# EAGLE board HV Board rev6 (EAGLE 9.2.2)
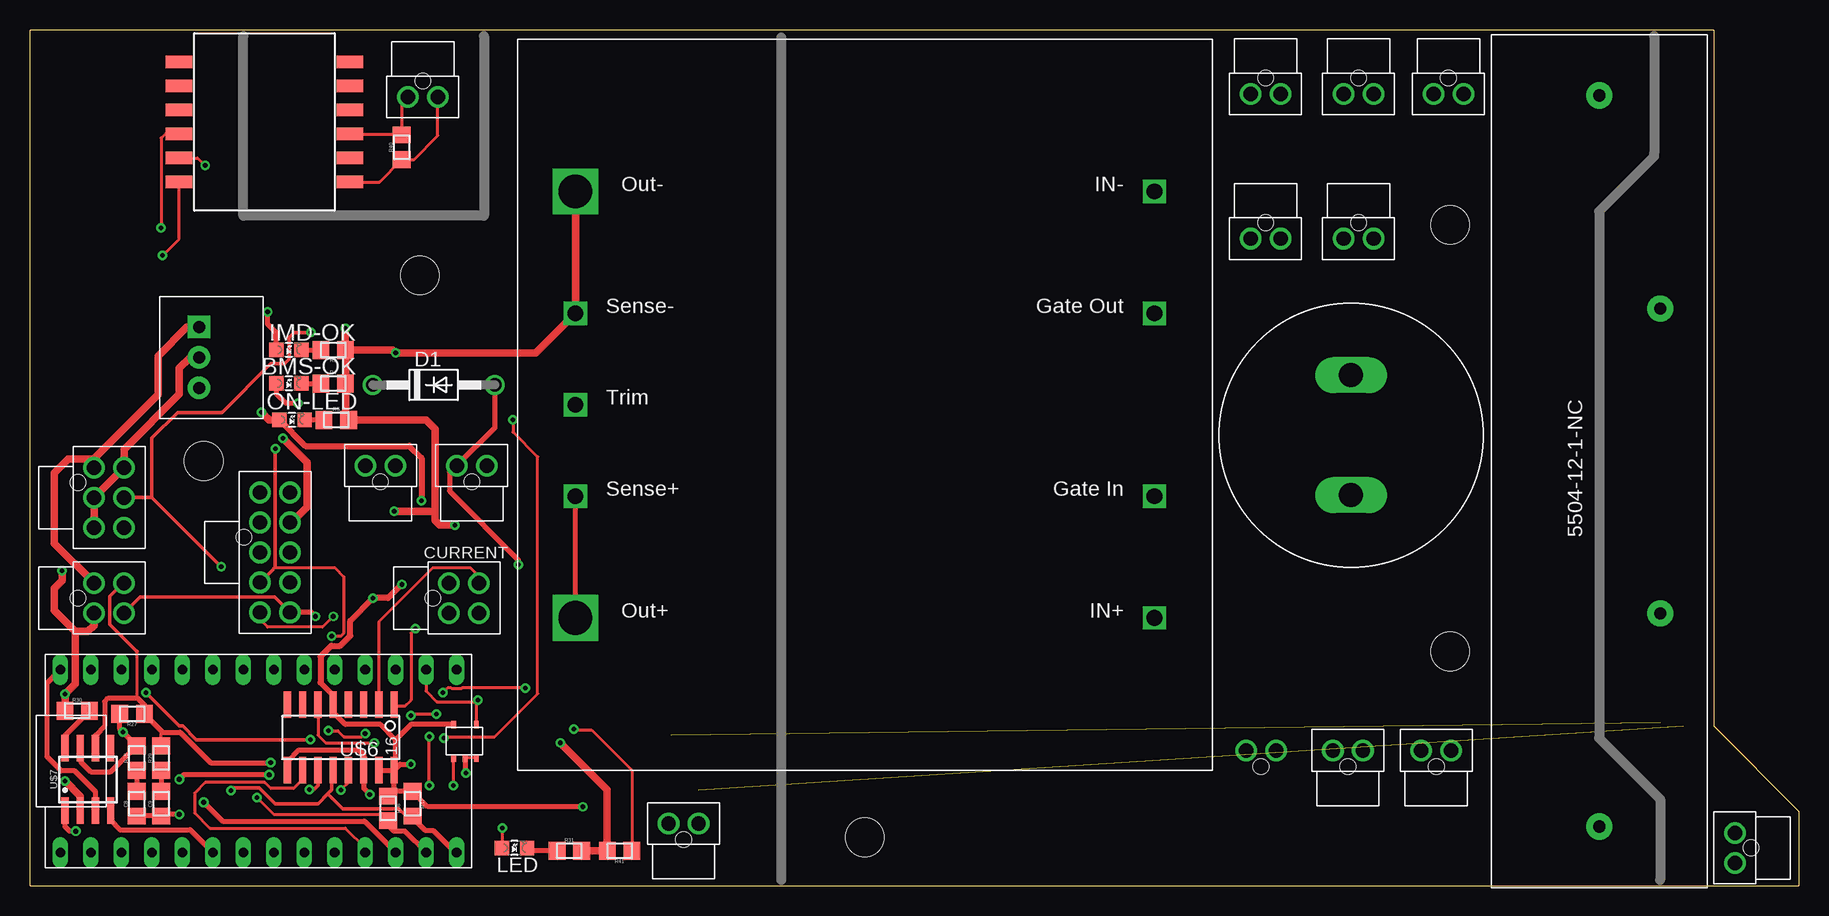
[diagram p0: board, top side]
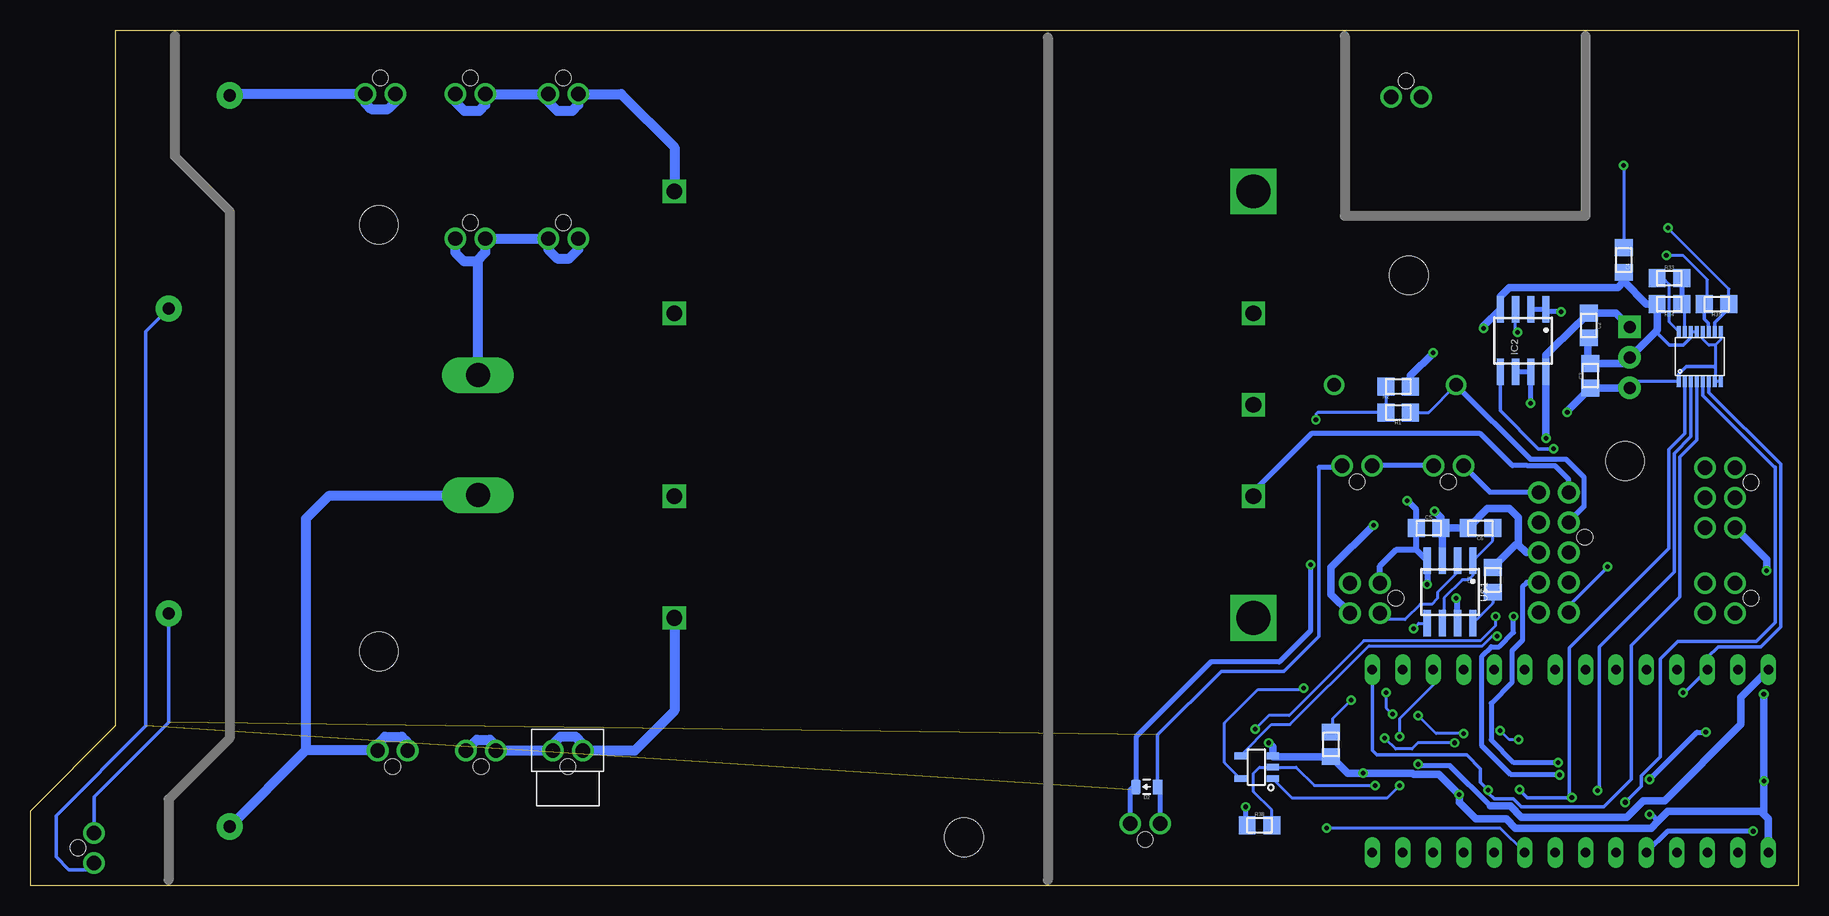
[diagram p1: board, bottom side, seen from below]

Size 147.45 x 71.37 mm. Coordinates in mm from the lower left corner, seen from the top.
Outline: 0,0 147.45,0 147.45,6.22 140.34,13.34 140.34,71.37 0,71.37 0,0
Copper layers (1*16): Top 0.035mm / dielectric 1.5mm / Bottom 0.035mm
Design rules "DRC Advanced Circuits": minimum track width 6mil, minimum drill 10mil, track to track 6mil, track to pad 6mil, pad to pad 6mil, via to via 6mil, smd to smd 6mil, copper to edge 40mil, drill to drill 6mil, minimum pad ring 10mil, minimum via ring 8mil, stop-mask expansion 4mil, vias tented up to drill 0mil, thermal gap 10mil
Net classes: 1 TS: clearance 8.5 mm to class 0; 2 ISO_SPI: clearance 8.5 mm to class 0, clearance 8.5 mm to class 1
Holes 3.2 mm at 14.48,35.43 118.36,55.12 69.6,4.06 32.51,50.93 118.36,19.56

## Footprints (pad centres in the part's own frame; a part is rotated, then mirrored left to right if it is on the bottom)
LED-805 = smd 1.2 x 1.2: A 0,-1.05; C 0,1.05
LLS2V221MELZ = drill 2 long: P$1 -5,0; P$2 5,0
0805 = smd 1.4 x 1.5: 1 -1.025,0; 2 1.025,0
NANO-FIT_VERTICAL-4 = drill 1.2: P$1 -1.25,0; P$2 1.25,0; P$3 -1.25,2.5; P$4 1.25,2.5 | hole 1.3: 0,-1.34
DO-41 = drill 1.118: A 5.08,0; C -5.08,0
0805_D = smd 0.8 x 1.2: A -0.9,0; C 0.9,0
NANO-FIT_VERTICAL-2 = drill 1.2: P$1 -1.25,0; P$2 1.25,0 | hole 1.3: 0,-1.34
OKI-78SR = drill 1 pad 1.88 square: 1 -2.54,0 | drill 1 pad 1.88: 2 0,0; 3 2.54,0
SOIC-08 = smd 0.6 x 2.2: 1 -1.905,-2.6; 2 -0.635,-2.6; 3 0.635,-2.6; 4 1.905,-2.6; 5 1.905,2.6; 6 0.635,2.6; 7 -0.635,2.6; 8 -1.905,2.6
NANO-FIT_VERTICAL-6 = drill 1.2: P$1 -2.5,0; P$2 0,0; P$3 2.5,0; P$4 -2.5,2.5; P$5 0,2.5; P$6 2.5,2.5 | hole 1.3: -1.25,-1.34
NANO-FIT_VERTICAL-10 = drill 1.2: P$1 -5,0; P$2 -2.5,0; P$3 0,0; P$4 2.5,0; P$5 5,0; P$6 -5,2.5; P$7 -2.5,2.5; P$8 0,2.5; P$9 2.5,2.5; P$10 5,2.5 | hole 1.3: -1.27,-1.34
HM2102NLT = smd 1.067 x 2.184: P$1 0,0; P$2 2,0; P$3 4,0; P$4 6,0; P$5 8,0; P$6 10,0; P$7 10,14.25; P$8 8,14.25; P$9 6,14.25; P$10 4,14.25; P$11 2,14.25; P$12 0,14.25
SOT-23-5 = smd 1 x 0.55: 1 -1.35,0.95; 2 -1.35,0; 3 -1.35,-0.95; 4 1.35,-0.95; 5 1.35,0.95
HV_DCDC_VI-J71-CZ = drill 1.3 square: 1VIN+ 5.08,-12.7; 2GATEIN 5.08,-22.86; 3GATEOUT 5.08,-38.1; 4VIN- 5.08,-48.26; 6SENSE+ 53.34,-22.86; 7TRIM 53.34,-30.48; 8SENSE- 53.34,-38.1 | drill 2.8 square: 5VOUT+ 53.34,-12.7; 9VOUT- 53.34,-48.26
SOIC-16 = smd 0.6 x 2.2: 1 -4.445,-2.794; 2 -3.175,-2.794; 3 -1.905,-2.794; 4 -0.635,-2.794; 5 0.635,-2.794; 6 1.905,-2.794; 7 3.175,-2.794; 8 4.445,-2.794; 9 4.445,2.667; 10 3.175,2.667; 11 1.905,2.667; 12 0.635,2.667; 13 -0.635,2.667; 14 -1.905,2.667; 15 -3.175,2.667; 16 -4.445,2.667
MSOP-16 = smd 0.305 x 0.889: 1 -0.1,-0.5; 2 0.4,-0.5; 3 0.9,-0.5; 4 1.4,-0.5; 5 1.9,-0.5; 6 2.4,-0.5; 7 2.9,-0.5; 8 3.4,-0.5; 9 3.4,3.7; 10 2.9,3.7; 11 2.4,3.7; 12 1.9,3.7; 13 1.4,3.7; 14 0.9,3.7; 15 0.4,3.7; 16 -0.1,3.7
TEENSY_3.2_SIMPLE = drill 0.8 long: 3.3V 16.51,29.21; A0 16.51,3.81; A1 16.51,6.35; A2 16.51,8.89; A3 16.51,11.43; A4 16.51,13.97; A5 16.51,16.51; A6 16.51,19.05; A7 16.51,21.59; A8 16.51,24.13; A9 16.51,26.67; AGND 16.51,31.75; D0(RX1) 1.27,31.75; D1(TX1) 1.27,29.21; D2 1.27,26.67; D3(CANTX) 1.27,24.13; D4(CANRX) 1.27,21.59; D5 1.27,19.05; D6 1.27,16.51; D7(RX3) 1.27,13.97; D8(TX3) 1.27,11.43; D9(RX2) 1.27,8.89; D10(TX2) 1.27,6.35; D11 1.27,3.81; D12 1.27,1.27; D13 16.51,1.27; GND 1.27,34.29; VIN 16.51,34.29
SOT23-5 = smd 0.61 x 0.406: EN -2.794,0; GND -2.794,0.94; VCC 0,1.905; WDI 0,0; WDO -2.794,1.905
5504-12-1-NC = drill 1.016 pad 2.184: COIL+ 48.26,-14.097; COIL- 22.86,-14.097; CONTACT1 5.08,-9.017; CONTACT2 66.04,-9.017

## Placement (x,y rotation side)
BMS-OK  GREEN  [LED-805]  21.59,41.91 270 top
C1  180µF  [LLS2V221MELZ]  110.11,37.59 90 top
C2  10uF  [0805]  17.53,46.74 270 bottom
C3  10uF  [0805]  17.4,42.55 90 bottom
C4  27pF  [0805]  14.61,52.2 270 bottom
C5  0.1uF  [0805]  30.86,29.84 0 bottom
C6  0.1uF  [0805]  26.54,29.84 180 bottom
C7  530pF  [0805]  25.53,25.53 90 bottom
C8  560pF  [0805]  8.89,6.86 90 top
C9  560pF  [0805]  10.92,6.86 90 top
CURRENT  CURRENT  [NANO-FIT_VERTICAL-4]  34.92,24 270 top
D1  DIODE  [DO-41]  33.66,41.78 0 top
D2  DIODE0805  [0805_D]  54.36,8.26 180 bottom
DISCH+  DISCHARGE+  [NANO-FIT_VERTICAL-2]  118.24,66.04 180 top
DISCH-  DISCHARGE -  [NANO-FIT_VERTICAL-2]  103,53.98 180 top
HV+FUSED_1A  FUSED+  [NANO-FIT_VERTICAL-2]  102.62,11.3 0 bottom
HV+UNFUSED  HV+UNFUSED  [NANO-FIT_VERTICAL-2]  117.22,11.3 0 top
HV-FUSED_1A  FUSED-  [NANO-FIT_VERTICAL-2]  103,66.04 180 top
HV-UNFUSED  HV-UNFUSED  [NANO-FIT_VERTICAL-2]  110.74,53.98 180 top
IC1  OKI-78SR  [OKI-78SR]  14.1,44.07 270 top
IC2  NE5532SOIC  [SOIC-08]  22.99,45.47 180 bottom
IMD  IMD  [NANO-FIT_VERTICAL-6]  5.33,32.38 270 top
IMD-OK  YELLOW  [LED-805]  21.59,44.7 270 top
IMD_HV+  IMD+  [NANO-FIT_VERTICAL-2]  109.86,11.3 0 top
IMD_HV-  IMD-  [NANO-FIT_VERTICAL-2]  110.74,66.04 180 top
INTERLOCK  INTERLOCK  [NANO-FIT_VERTICAL-2]  29.21,35.05 0 top
ISO_SPI  ISO_SPI  [NANO-FIT_VERTICAL-2]  32.75,65.79 180 top
LED  BLUE  [LED-805]  40.39,3.17 270 top
MAIN  MAIN  [NANO-FIT_VERTICAL-10]  19.18,27.81 270 top
ON-LED  PURPLE  [LED-805]  21.84,38.86 270 top
POWER  POWER  [NANO-FIT_VERTICAL-4]  5.33,24 270 top
R1  43k  [0805]  33.4,39.5 180 bottom
R2  12k  [0805]  33.4,41.66 180 bottom
R3  820  [0805]  25.27,44.7 180 top
R4  820  [0805]  25.27,41.91 0 top
R5  270  [0805]  25.53,38.86 0 top
R27  120  [0805]  8.51,14.35 180 top
R28  100  [0805]  8.89,10.67 90 top
R29  100  [0805]  10.92,10.67 90 top
R30  1k  [0805]  3.94,14.61 0 top
R31  43  [0805]  44.96,2.92 0 top
R33  1k  [0805]  10.79,50.67 0 bottom
R34  1k  [0805]  10.79,48.51 180 bottom
R35  120  [0805]  6.86,48.51 180 bottom
R36  2k  [0805]  29.84,6.48 270 top
R37  2k  [0805]  31.88,6.86 270 top
R38  430  [0805]  44.96,5.08 0 bottom
R40  100  [0805]  30.99,61.59 90 top
R41  2k  [0805]  49.15,2.92 180 top
R42  10k  [0805]  38.99,11.81 270 bottom
RELAY  RELAY_JUMPER  [NANO-FIT_VERTICAL-2]  142.11,3.17 90 top
RELAY_JUMP  RELAY_JUMPER  [NANO-FIT_VERTICAL-2]  54.48,5.21 0 top
RELAYS  RELAYS  [NANO-FIT_VERTICAL-2]  36.83,35.05 0 top
U$1  [SOIC-08]  29.08,24.51 180 bottom
U$2  HM2102NLT  [HM2102NLT]  26.67,58.71 90 top
U$3  SN74LVC1G08  [SOT-23-5]  45.21,9.91 180 bottom
U$5  HV_DCDC_VI-J71-CZ  [HV_DCDC_VI-J71-CZ]  98.81,9.65 180 top
U$6  MCP3208SOIC  [SOIC-16]  25.91,12.32 180 top
U$7  MCP2551  [SOIC-08]  4.83,8.89 0 top
U$8  LTC6820  [MSOP-16]  9.91,42.55 0 bottom
U$9  TEENSY_3.2_SIMPLE  [TEENSY_3.2_SIMPLE]  36.83,1.52 90 top
U$10  STWD100  [SOT23-5]  37.21,13.46 90 top
U$12  5504-12-1-NC  [5504-12-1-NC]  121.79,-0.13 90 top

## Library data of the parts
BMS-OK C1-C9 CURRENT D1 D2 DISCH+ DISCH- HV+FUSED_1A HV+UNFUSED HV-FUSED_1A HV-UNFUSED IC1 IC2 IMD IMD-OK IMD_HV+ IMD_HV- INTERLOCK ISO_SPI LED MAIN ON-LED POWER R1-R5 R27-R31 R33-R38 R40-R42 RELAY RELAY_JUMP RELAYS U$1-U$3 U$5-U$10 U$12 = HyTechDevices

## Nets
+3V3: U$3.5 U$8.6 U$9.3.3V
+5V: C3.1 C5.1 CURRENT.P$1 IC1.3 ON-LED.A R36.1 R37.1 R38.1 U$1.4 U$1.7 U$6.5 U$6.15 U$6.16 U$7.3 U$8.1 U$8.7 U$8.8 U$8.9 U$8.12 U$9.VIN U$10.VCC
+12V: C2.1 IC1.1 IC2.8 IMD.P$1 MAIN.P$7 POWER.P$1
BMS_OK: IC2.5 MAIN.P$4 U$3.4
CANH: MAIN.P$10 POWER.P$4 R27.2 R28.2 U$7.7
CANL: MAIN.P$9 POWER.P$3 R27.1 R29.2 U$7.6
CS_LTC6820: U$8.5 U$9.D10(TX2)
CS_MCP3208: U$6.10 U$9.D9(RX2)
CUR_SENSE: CURRENT.P$2 U$1.2
DISCHARGE_RELAY_GND: D2.A RELAY.P$2 RELAY_JUMP.P$1 RELAYS.P$2 U$12.COIL-
GND: C2.2 C3.2 C4.2 C5.2 C6.2 C7.2 C8.1 C9.1 CURRENT.P$4 IC1.2 IC2.4 IMD.P$2 IMD.P$3 IMD.P$4 MAIN.P$8 POWER.P$2 R2.1 R3.1 R4.2 R5.2 R30.1 R31.2 R34.2 R41.2 R42.2 U$1.3 U$3.3 U$5.8SENSE- U$5.9VOUT- U$6.9 U$6.14 U$7.2 U$8.13 U$8.14 U$9.GND U$10.EN U$10.GND
HV+FUSED_1A [TS]: HV+FUSED_1A.P$1 HV+FUSED_1A.P$2 IMD_HV+.P$1 IMD_HV+.P$2 U$5.1VIN+
HV+UNFUSED [TS]: C1.P$1 HV+UNFUSED.P$1 HV+UNFUSED.P$2 U$12.CONTACT1
HV+UNFUSED_FSAE_DISCHARGE [TS]: DISCH+.P$1 DISCH+.P$2 U$12.CONTACT2
HV-FUSED_1A [TS]: HV-FUSED_1A.P$1 HV-FUSED_1A.P$2 IMD_HV-.P$1 IMD_HV-.P$2 U$5.4VIN-
HV-UNFUSED [TS]: C1.P$2 DISCH-.P$1 DISCH-.P$2 HV-UNFUSED.P$1 HV-UNFUSED.P$2
ISOSPI-M [ISO_SPI]: ISO_SPI.P$2 R40.2 U$2.P$3
ISOSPI-P [ISO_SPI]: ISO_SPI.P$1 R40.1 U$2.P$1
MISO: R37.2 U$6.12 U$8.3 U$9.D12
MOSI: R36.2 U$6.11 U$8.2 U$9.D11
N$1: U$1.5 U$6.1
N$2: C6.1 U$1.1 U$1.6
N$3: ON-LED.C R5.1
N$4: C7.1 U$1.8
N$24: R1.2 R2.2 U$6.6
N$25: U$7.1 U$9.D3(CANTX)
N$26: R30.2 U$7.8
N$27: C8.2 R28.1
N$28: C9.2 R29.1
N$29: LED.C R31.1
N$31: R33.1 U$8.16
N$32: R33.2 R34.1 U$8.15
N$33: R35.1 U$2.P$10 U$8.10
N$34: R35.2 U$2.P$12 U$8.11
N$35: C4.1 U$2.P$11
N$36: U$7.4 U$9.D4(CANRX)
N$37: LED.A U$9.D7(RX3)
N$38: R38.2 U$3.2 U$10.WDO
N$40: U$3.1 U$9.A1
N$42: IC2.1 IC2.2 IMD-OK.A
N$43: BMS-OK.A IC2.6 IC2.7
N$44: BMS-OK.C R4.1
N$45: IMD-OK.C R3.2
N$50: R42.1 U$9.A0 U$10.WDI
OKHS: IC2.3 IMD.P$5 MAIN.P$5 R41.1
SCK: U$6.13 U$8.4 U$9.D13
SHUTDOWN6: INTERLOCK.P$1 MAIN.P$6
SHUTDOWN7: D1.A D2.C INTERLOCK.P$2 RELAY.P$1 RELAY_JUMP.P$2 RELAYS.P$1 U$12.COIL+
SHUTDOWN7_EXT_OUT: D1.C MAIN.P$2 R1.1
TEMP_SENSE: CURRENT.P$3 U$6.2
TSAL+: MAIN.P$1 U$5.5VOUT+ U$5.6SENSE+

## Tracks (layer width: path | path; a pad name or v marks a point on that pad's centre or on a via)
+3V3  (via drill 0.38)
  Top 0.254: v24.89,12.95 25.65,12.95 26.16,12.45 27.67,12.45 v27.94,12.71 | v33.88,14.32 31.84,14.32 v31.75,14.22 | v41.27,16.51 36.01,16.51 35.95,16.45 35.17,16.45 35.11,16.51 34.8,16.51 v34.42,16.13
  Top 0.305: v9.65,16.13 12.44,13.34 12.71,13.34 13.86,12.19 v23.37,12.19
  Bottom 0.254: v23.37,12.19 24.13,12.19 v24.89,12.95 | v27.94,12.71 30.24,12.71 v31.75,14.22 | U$3.5 47.88,10.27 47.88,13.59 45.09,16.38 41.4,16.38 v41.27,16.51 | v33.88,14.32 34.42,14.86 v34.42,16.13
  Bottom 0.305: U$8.6 7.51,41.16 1.52,35.18 1.52,21.59 3.17,19.94 6.73,19.94 7.62,19.05 U$9.3.3V 9.53,16.13 v9.65,16.13
+5V  (via drill 0.38)
  Top 0.254: U$6.16 30.48,9.78 30.48,9.91
  Top 0.406: U$7.3 5.46,7.87 3.74,9.59 2.6,9.59 1.4,10.79 1.4,16.89 U$9.VIN | U$6.16 30.35,8.01 R36.1 30.23,7.88 R37.1 33.16,6.6 v46.1,6.6 | U$10.VCC 31.75,13.46 30.48,12.19 | 30.48,12.19 29.21,13.46 26.29,13.46 25.27,14.48 U$6.5 25.27,15.88 24.21,16.94 | 30.48,9.91 30.48,12.19 | U$6.16 30.85,10.15 v31.75,10.15 | U$6.15 U$6.16
  Top 0.508: ON-LED.A 22.95,36.7 31.62,36.7 32.64,35.69 v32.64,32.13 | v30.99,25.15 29.84,24 v28.57,24 26.7,22.12 26.7,20.86 25.86,20.03 25.11,20.03 24.21,19.13 24.21,16.94
  Top 0.61: v19.3,39.5 19.94,38.86 ON-LED.A
  Bottom 0.254: U$8.8 U$8.7 6.99,42.07 6.99,43.18 6.99,45.09 | 28.45,23.88 v28.57,24 | U$8.9 6.51,45.56 6.99,45.09 | 6.99,45.09 7.49,45.09 8.01,45.6 U$8.12 | U$8.1 13.58,42.05 IC1.3
  Bottom 0.305: U$8.1 10.01,42.7 9.4,43.31 7.11,43.31 6.99,43.18
  Bottom 0.406: v31.75,10.15 31.64,10.03 29.08,10.03 25.72,6.67 | R38.1 46.1,5.2 v46.1,6.6
  Bottom 0.508: v32.64,32.13 31.89,31.38 C5.1 31.89,28.01 | 31.89,28.01 U$1.4 v30.99,25.15 | 31.89,28.01 33.59,28.01 34.92,26.67 CURRENT.P$1 | U$1.7 28.45,23.88
  Bottom 0.61: 25.72,6.67 24.07,6.67 23.11,5.71 14.35,5.71 12.95,7.11 11.18,7.11 4.83,13.46 4.83,15.75 U$9.VIN | IC1.3 C3.1 19.3,39.62 v19.3,39.5
+12V  (via drill 0.38)
  Top 0.61: v21.08,37.34 23.11,35.31 23.11,31.62 21.8,30.31 MAIN.P$7 | 5.29,35.61 10.67,40.98 10.67,44.2 13.08,46.61 IC1.1 | 5.29,35.61 3.18,35.61 2.02,34.45 2.02,32.82 2.03,32.81 2.03,28.55 POWER.P$1 | IMD.P$1 5.29,34.93 5.29,35.61
  Bottom 0.61: v21.08,37.34 IC2.8 21.08,44.25 18.46,46.87 18.42,46.87 C2.1 17.52,47.75 15.24,47.75 IC1.1
BMS_OK  (via drill 0.38)
  Top 0.254: 20.11,26.25 20.41,26.54 25.4,26.54 26.16,25.78 26.16,21.08 25.91,20.83 v25.15,20.83
  Top 0.305: MAIN.P$4 20.11,26.25 20.45,26.58 v20.45,36.45
  Bottom 0.254: v25.15,20.83 25.59,20.83 26.38,20.04 35.84,20.04 42.42,13.46 43.96,13.46 U$3.4
  Bottom 0.305: v20.45,36.45 21.72,36.45 24.89,39.62 IC2.5
CANH  (via drill 0.38, 0.4)
  Top 0.305: POWER.P$4 9.19,24.11 20.38,24.11 MAIN.P$10
  Top 0.406: R27.2 7.48,13.1 v7.75,12.83 R28.2 7.62,10.42 7.62,10.41 6.73,9.53 5.08,9.53 4.19,10.41 U$7.7 | v19.94,9.27 12.83,9.27 v12.45,8.89 | v23.79,22.48 23.45,22.81 MAIN.P$10
  Bottom 0.406: v12.45,8.89 8.51,12.83 v7.75,12.83 | v19.94,9.27 24,9.27 26.42,11.68 26.42,19.18 25.65,19.94 24.98,19.94 23.79,21.13 v23.79,22.48
CANL  (via drill 0.4)
  Top 0.254: 8.95,15.68 8.95,19.56 | R29.2 10.92,12.7 11.05,12.83
  Top 0.305: POWER.P$3 7.73,25.25 6.63,24.16 6.63,21.82 8.89,19.56 8.95,19.56
  Top 0.406: U$7.6 5.46,12.57 6.22,13.34 6.22,15.37 6.54,15.68 8.95,15.68 9.53,15.11 9.53,13.85 R27.1 11.05,12.83 12.5,12.83 15.05,10.28 v20.07,10.28
  Bottom 0.406: v20.07,10.28 23.75,10.28 25.65,12.19 25.65,15.24 23.91,16.99 23.91,19.62 23.04,20.48 23.04,24.97 22.69,25.31 MAIN.P$9
CS_LTC6820  (via drill 0.4)
  Top 0.406: v14.48,6.99 16.07,5.4 27.88,5.4 U$9.D10(TX2)
  Bottom 0.305: v14.48,6.99 13.15,8.31 13.15,9.18 11.56,10.78 11.56,18.92 10.08,20.4 3.56,20.4 1.98,21.97 1.98,34.92 2.03,34.92 8.01,40.9 U$8.5
CS_MCP3208
  Top 0.254: U$6.10 22.73,8.89 21.97,8.13 20.07,8.13 19.56,8.64 14.61,8.64 13.72,7.75 13.72,6.1 14.99,4.83 26.29,4.83 27.94,3.17 U$9.D9(RX2)
CUR_SENSE
  Bottom 0.254: U$1.2 28.57,26.98 28.57,26.04 30.1,24.51 30.1,24 30.61,23.5 31.56,23.5 32.84,22.21 34.33,22.21 34.87,22.75 CURRENT.P$2
DISCHARGE_RELAY_GND  (1 unrouted)
  Bottom 0.305: U$12.COIL- 135.89,13.65 142.11,7.43 RELAY.P$2 | D2.A 53.46,12.6 48.15,17.91 42.93,17.91 40.01,20.83 40.01,34.92
  Bottom 0.406: RELAYS.P$2 38.21,34.92 40.01,34.92 | RELAY_JUMP.P$1 53.23,8.03 D2.A
GND  (via drill 0.38, 0.4)
  Top 0.254: U$10.EN U$10.GND
  Top 0.406: C8.1 C9.1 11.06,5.97 v12.45,5.97 | U$6.9 21.46,10.41 22.35,11.3 27.43,11.3 27.81,10.92 U$6.14 27.81,8.13 v28.32,7.62 | U$10.GND 36.27,9.45 v36.32,9.4
  Top 0.61: v26.29,46.48 26.29,44.71 R3.1 | R3.1 R4.2 26.3,39.12 R5.2 33.02,38.86 33.78,38.1 33.78,31.37 | 33.78,31.37 33.78,30.48 34.16,30.1 v35.43,30.1 | v30.35,31.24 33.66,31.24 33.78,31.37 | IMD.P$3 IMD.P$2 IMD.P$4 7.83,36.41 12.45,41.02 12.45,43.18 13.34,44.07 IC1.2 | v2.68,26.29 2.68,25.48 2.02,24.82 2.02,23 3.78,21.24 | 3.78,21.24 3.81,21.21 4.83,21.21 5.33,21.72 POWER.P$2 | 3.78,21.24 3.78,16.86 v2.92,16 2.92,14.61 R30.1 | U$7.2 4.19,7.49 v2.92,8.76 | v44.2,11.94 48.12,8.01 R41.2 R31.2 | R3.1 30.23,44.7 v30.48,44.45 42.16,44.45 U$5.8SENSE- U$5.9VOUT-
  Bottom 0.254: U$8.14 U$8.13 | 39.06,10.86 R42.2
  Bottom 0.305: U$8.14 9.05,46.2 9.05,45.67 9.64,45.09 10.79,45.09 11.82,46.11 11.82,46.35
  Bottom 0.406: v12.45,5.97 12.32,5.97 11.75,5.4
  Bottom 0.61: 2.92,5.97 3.18,6.22 10.92,6.22 11.75,5.4 12.32,4.83 23.62,4.83 24.38,5.59 26.92,5.59 28.32,6.99 v28.32,7.62 30,9.3 32.1,9.3 32.2,9.4 v36.32,9.4 37.6,9.4 39.06,10.86 | v26.29,46.48 26.29,46.67 IC2.4 24.89,49.15 24.13,49.91 15.11,49.91 14.61,50.42 | v30.48,44.45 32.38,42.55 R2.1 | v30.35,31.24 29.84,30.73 C5.2 | v35.43,30.1 38.99,26.54 38.99,24.32 CURRENT.P$4 | 23.37,28.45 23.37,30.73 24.13,31.5 25.96,31.5 26.68,30.78 26.68,30.74 C6.2 C5.2 | 23.37,28.45 22.73,27.81 MAIN.P$8 | IMD.P$3 2.68,27.23 v2.68,26.29 | v2.92,16 v2.92,8.76 2.92,5.97 | R42.2 43.79,10.79 U$3.3 43.86,11.6 v44.2,11.94 | C7.2 23.63,28.45 23.37,28.45 | C2.2 17.59,45.78 17.59,43.77 C3.2 14.6,43.57 IC1.2 11.82,46.35 R34.2 12.7,48.51 14.61,50.42 | 2.92,5.97 2.54,5.59 U$9.GND | C5.2 29.72,29.73 U$1.3 | C4.2 14.61,50.42
HV+FUSED_1A
  Bottom 0.813: U$5.1VIN+ 93.73,14.61 97.03,11.3 HV+FUSED_1A.P$2 101.37,11.83 101.98,12.45 103.25,12.45 103.87,11.83 HV+FUSED_1A.P$1 IMD_HV+.P$1 108.61,11.7 109.09,12.19 110.22,12.19 IMD_HV+.P$2
HV+UNFUSED
  Bottom 0.813: U$12.CONTACT1 124.46,11.3 | C1.P$1 110.19,32.51 122.56,32.51 124.46,30.61 124.46,11.3 | 124.46,11.3 HV+UNFUSED.P$2 118.47,11.83 117.86,12.45 116.46,12.45 115.97,11.96 HV+UNFUSED.P$1
HV+UNFUSED_FSAE_DISCHARGE
  Bottom 0.813: U$12.CONTACT2 130.68,66.04 DISCH+.P$1 119.49,65.26 119,64.77 117.6,64.77 116.99,65.39 DISCH+.P$2
HV-FUSED_1A
  Bottom 0.813: U$5.4VIN- 93.73,61.59 98.17,66.04 HV-FUSED_1A.P$2 101.75,65.13 102.23,64.64 103.5,64.64 104.25,65.39 HV-FUSED_1A.P$1 IMD_HV-.P$2 109.49,65.13 109.98,64.64 111.25,64.64 111.99,65.39 IMD_HV-.P$1
HV-UNFUSED
  Bottom 0.813: 110.24,52.07 109.49,52.81 HV-UNFUSED.P$2 DISCH-.P$1 104.25,53.07 103.5,52.32 102.49,52.32 101.75,53.07 DISCH-.P$2 | 110.24,52.07 111.25,52.07 111.99,52.81 HV-UNFUSED.P$1 | C1.P$2 110.11,51.94 110.24,52.07
ISOSPI-M
  Top 0.254: U$2.P$3 30.9,62.71 R40.2 30.99,65.28 ISO_SPI.P$2
ISOSPI-P
  Top 0.254: U$2.P$1 29.12,58.71 R40.1 32,60.57 34,62.56 ISO_SPI.P$1
MISO  (via drill 0.38)
  Top 0.254: R37.2 31.82,5.77 31.81,5.77 | 25.27,9.53 U$6.12
  Top 0.305: 24.83,7.68 24,6.86 20.43,6.86 19.09,8.2 17,8.2 v16.76,7.96 | 24.83,7.68 25.15,8 25.15,9.4 25.27,9.53 | R37.2 31.34,5.83 30.72,6.46 26.05,6.46 24.83,7.68
  Top 0.406: 31.81,5.77 32.95,4.64 33.59,4.64 35.43,2.79 U$9.D12
  Bottom 0.305: U$8.3 9.01,37.46 10.38,36.08 10.38,26.19 16.64,19.94 16.64,8.09 v16.76,7.96
MOSI  (via drill 0.38, 0.4)
  Top 0.254: R36.2 29.33,5.97 20.32,5.97 v18.92,7.37
  Top 0.305: U$6.11 24,8.38 23.74,8.12 23.37,8.12 v23.29,8.04
  Top 0.406: U$9.D11 31.24,4.57 30.35,4.57 29.84,5.08 R36.2
  Bottom 0.254: U$8.2 9.52,42.03
  Bottom 0.305: v23.29,8.04 22.62,7.37 v18.92,7.37 19.12,7.56 19.12,19.85 10.84,28.12 10.84,36.4 9.52,37.72 9.52,42.03
N$1  (via drill 0.38)
  Top 0.254: v32.13,21.46 31.75,21.08 31.75,15.49 31.24,14.99 30.48,14.99 U$6.1
  Bottom 0.254: v32.13,21.46 31.68,21.91 U$1.5
N$2
  Bottom 0.254: C6.1 25.52,28.77 U$1.1 27.18,25.91 27.56,25.53 28.07,25.53 29.59,24 29.59,22.04 U$1.6
N$3
  Top 0.406: R5.1 ON-LED.C
N$4
  Bottom 0.254: U$1.8 25.53,23.56 C7.1
N$24  (via drill 0.38)
  Top 0.254: v28.7,11.94 24.64,11.94 24,12.57 U$6.6 | v40.26,38.86 40.26,37.85 42.33,35.78 42.33,16.04 38.73,12.45 34.63,12.45 v34.51,12.33
  Bottom 0.254: v28.7,11.94 31.75,11.94 32.26,11.43 33.61,11.43 v34.51,12.33 | v40.26,38.86 40.26,39.37 40.13,39.5 R1.2 R2.2
N$25  (via drill 0.4)
  Top 0.406: U$7.1 2.92,4.95 3.3,4.57 v3.81,4.57
  Bottom 0.406: v3.81,4.57 10.92,4.57 U$9.D3(CANTX)
N$26
  Top 0.406: R30.2 2.92,12.56 U$7.8
N$27
  Top 0.406: R28.1 C8.2
N$28
  Top 0.406: R29.1 C9.2
N$29
  Top 0.406: R31.1 41.69,2.92 LED.C
N$31
  Bottom 0.254: U$8.16 10.79,47.03 10.79,50.16 11.3,50.67 R33.1
N$32
  Bottom 0.254: U$8.15 9.51,48.5 9.77,48.77
  Bottom 0.406: R33.2 9.77,48.77 R34.1
N$33  (via drill 0.38)
  Top 0.254: v10.92,54.86 10.92,62.36 11.27,62.71 U$2.P$10
  Bottom 0.254: R35.1 5.83,49.77 v10.92,54.86
  Bottom 0.305: U$8.10 7.01,46.96 5.83,48.13 R35.1
N$34  (via drill 0.38)
  Top 0.254: v11.05,52.58 12.42,53.95 U$2.P$12
  Bottom 0.254: R35.2 7.62,48.78 7.62,50.55 9.65,52.58 v11.05,52.58
  Bottom 0.305: U$8.11 7.55,46.29 7.55,46.94 7.88,47.28 R35.2
N$35  (via drill 0.38)
  Top 0.254: U$2.P$11 13.97,60.71 v14.61,60.07
  Bottom 0.254: v14.61,60.07 C4.1
N$36
  Top 0.406: U$9.D4(CANRX) 13.34,4.7 7.49,4.7 6.73,5.46 U$7.4
N$37  (via drill 0.38)
  Top 0.254: v39.37,4.83 39.37,3.21 LED.A
  Bottom 0.254: U$9.D7(RX3) 24.89,4.83 v39.37,4.83
N$38  (via drill 0.38)
  Top 0.254: v35.31,8.38 U$10.WDO
  Bottom 0.254: R38.2 43.93,6.34 45.47,7.87 45.47,9.4 44.96,9.91 U$3.2 41.91,9.91 40.39,8.38 v35.31,8.38
N$40  (via drill 0.38)
  Top 0.254: v33.27,8.38 v33.27,12.45
  Bottom 0.254: U$3.1 42.27,7.37 34.29,7.37 v33.27,8.38 | v33.27,12.45 33.27,13.97 30.48,16.76 U$9.A1
N$42  (via drill 0.38)
  Top 0.406: IMD-OK.A 20.54,46.13 19.81,46.86 v19.81,47.88
  Bottom 0.406: v19.81,47.88 20.89,47.88 IC2.1 IC2.2
N$43  (via drill 0.38)
  Top 0.406: BMS-OK.A 20.54,41.05 21.34,40.26 v22.35,40.26
  Bottom 0.406: v22.35,40.26 IC2.7 IC2.6
N$44
  Top 0.406: BMS-OK.C R4.1
N$45
  Top 0.406: IMD-OK.C R3.2
N$50  (via drill 0.38)
  Top 0.254: U$10.WDI 37.21,15.37 | 37.21,15.37 v37.34,15.49 | U$9.A0 33.02,16.26 33.91,15.37 37.21,15.37
  Bottom 0.254: R42.1 38.86,12.96 38.86,13.97 v37.34,15.49
OKHS  (via drill 0.38)
  Top 0.254: R41.1 50.17,9.64 46.8,13.02 45.4,13.02 v45.34,13.08 | v25.27,22.48 24.38,21.59 19.81,21.59 19.18,22.23 MAIN.P$5
  Top 0.305: IMD.P$5 10.16,32.38 | 10.16,32.38 v15.94,26.61 | v23.43,46.16 22.04,46.16 21.59,45.72 21.59,43.94 21.21,43.56 20.07,43.56 16,39.5 12.32,39.5 10.16,37.34 10.16,32.38
  Bottom 0.254: v45.34,13.08 44.2,14.22 42.48,14.22 36.26,20.45 26.54,20.45 25.27,21.72 v25.27,22.48 | v23.43,46.16 23.62,46.35 IC2.3
  Bottom 0.305: v15.94,26.61 19.18,23.37 MAIN.P$5
SCK  (via drill 0.38)
  Top 0.254: v25.91,8 26.54,8.64 U$6.13
  Bottom 0.305: U$8.4 8.51,37.19 9.93,35.77 9.93,24.11 13.97,20.07 13.97,8.89 16.26,6.6 23.14,6.6 23.81,7.28 25.4,7.28 25.91,7.79 v25.91,8 26.54,8.64 26.54,9.78 27.69,10.92 35.18,10.92 35.56,11.3 U$9.D13
SHUTDOWN6
  Bottom 0.406: MAIN.P$6 25.72,32.81 INTERLOCK.P$1
SHUTDOWN7  (via drill 0.38)  (1 unrouted)
  Top 0.406: D1.A 38.73,38.21 RELAYS.P$1 35.01,34.49 34.96,34.49 34.96,32.94 40.7,27.2 v40.7,26.8
  Bottom 0.305: U$12.COIL+ 137.79,46.23 137.79,13.34 145.27,5.86 145.27,2.42 144.21,1.36 142.7,1.36 142.13,1.93 RELAY.P$1
  Bottom 0.406: INTERLOCK.P$2 RELAYS.P$1 | v40.7,26.8 40.7,21.27 43.31,18.67 49.02,18.67 55.26,12.44 55.26,8.51 | 55.26,8.51 D2.C | RELAY_JUMP.P$2 55.73,8.03 55.26,8.51
SHUTDOWN7_EXT_OUT
  Bottom 0.254: R1.1 30.86,39.5 D1.C
  Bottom 0.406: D1.C 22.39,35.59 19.42,35.59 17.92,34.09 17.92,31.64 19.21,30.35 MAIN.P$2
TEMP_SENSE
  Top 0.254: CURRENT.P$3 37.42,25.82 36.7,26.54 33.59,26.54 29.08,22.04 U$6.2
TSAL+
  Top 0.406: U$5.5VOUT+ U$5.6SENSE+
  Bottom 0.406: MAIN.P$1 19.18,33.91 20.3,35.03 22.62,35.03 22.63,35.05 23.88,35.05 26.54,37.72 40.64,37.72 45.47,32.89 U$5.6SENSE+

## Text on the board
tValues: FUSED- | IMD- | DISCHARGE+ | DISCHARGE- | UNFUSED- | FUSED+ | IMD+ | UNFUSED+
tDocu: GLV | GLV | isoSPI | GLV | GLV | 2019_hv_board_rev6 | Designed by Yvonne Yeh | isoSPI | TS | isoSPI | GLV | HV- Area | GLV | isoSPI | GLV | GLV | TS | GLV | - | TS | GLV | Grounded Low Voltage PCB Area | TS | GLV | IMD | HV+ Area | + | TS | GLV | TS | GLV | TS | TRACTIVE SYSTEM / PCB AREA | DANGER HIGH VOLTAGE | GLV
bDocu: GLV | isoSPI | GLV | GLV | GLV | TS | GLV | isoSPI | isoSPI | GLV | isoSPI | GLV | GLV | GLV | TS | GLV | TS | Grounded Low Voltage PCB Area | GLV | TS | GLV | TS | TS | GLV | GLV | TS | TRACTIVE SYSTEM / PCB AREA | DANGER HIGH VOLTAGE